# Altium PCB Power&FT232.PcbDoc
Units mil, origin at the board's own origin, x right, y up, seen from the top; angles counter-clockwise.
Board outline 1305 x 1305 mil, 2 copper layers (Top Layer, Bottom Layer); 27 components, 24 nets, 126 pads, 30 vias.
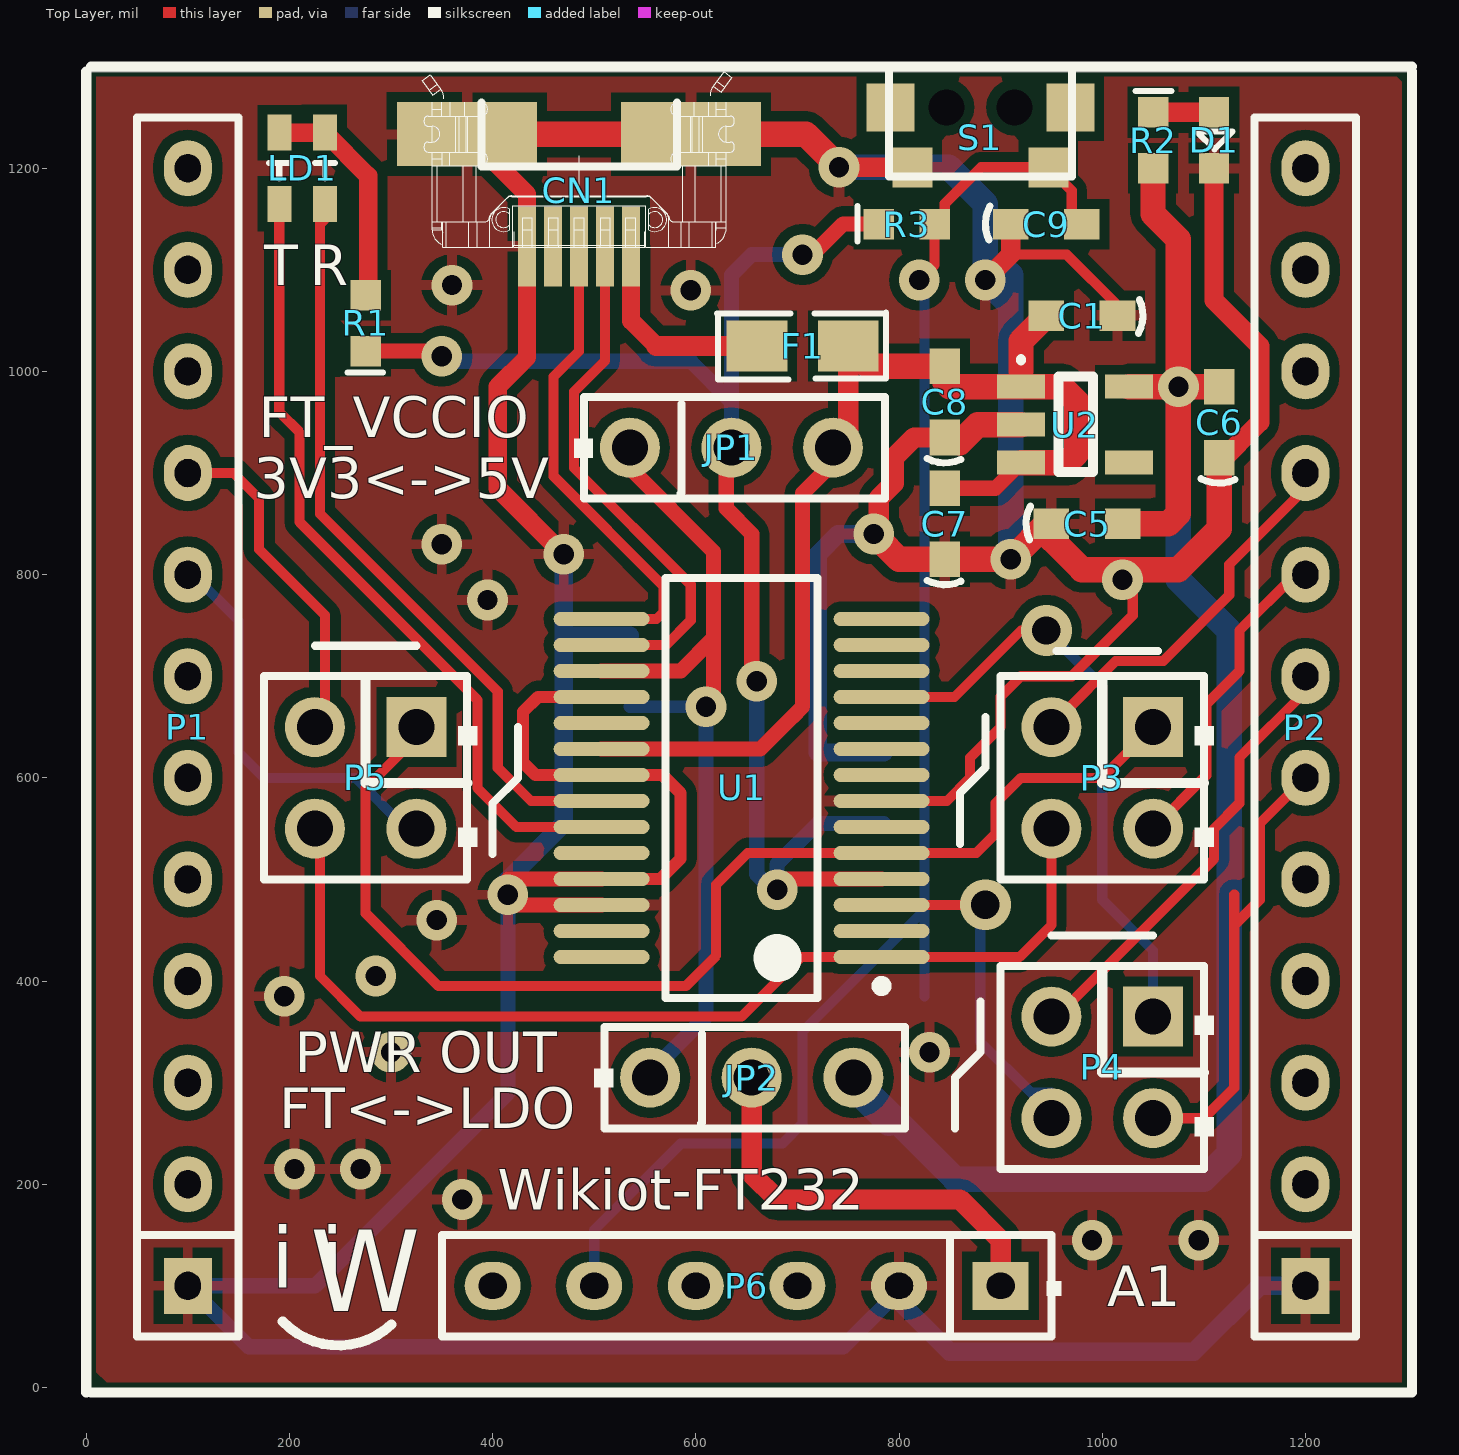
[diagram p0: Top Layer view]
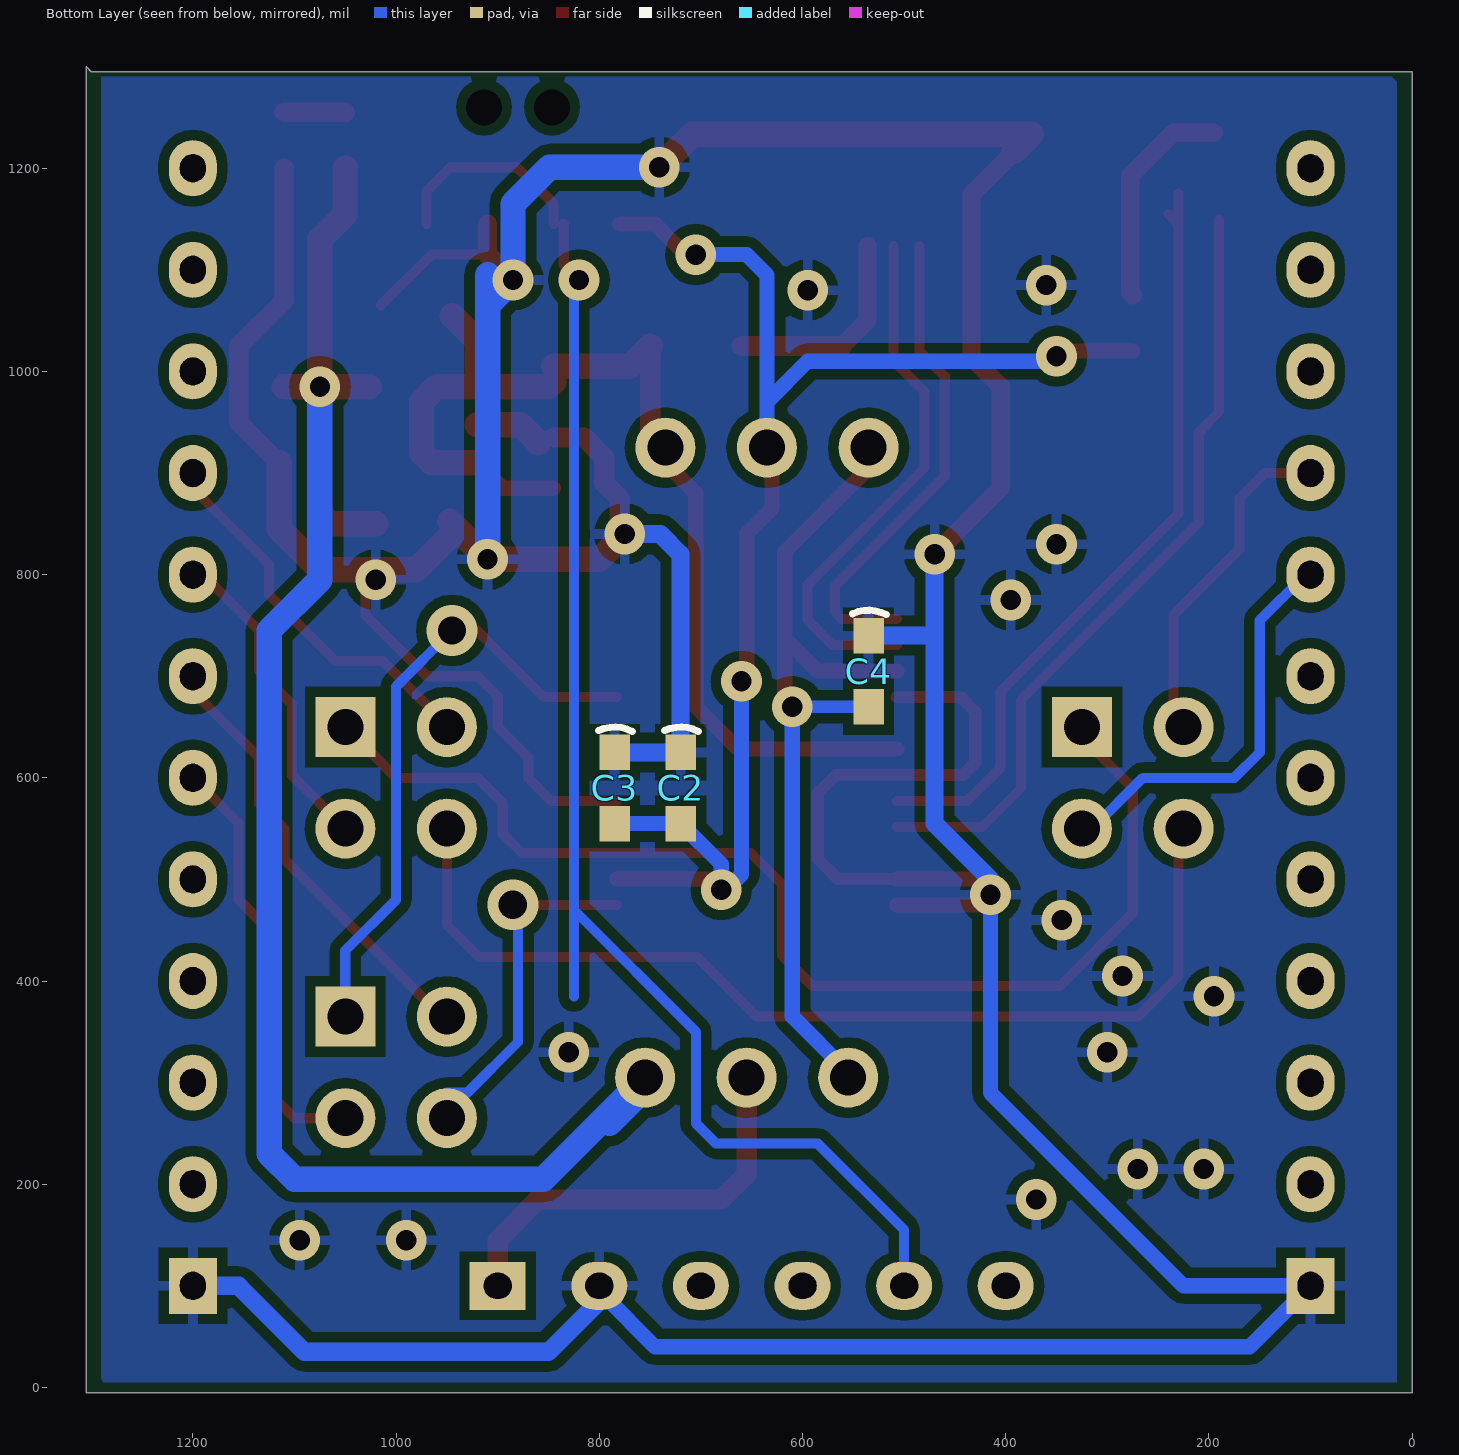
[diagram p1: Bottom Layer view, seen from below]
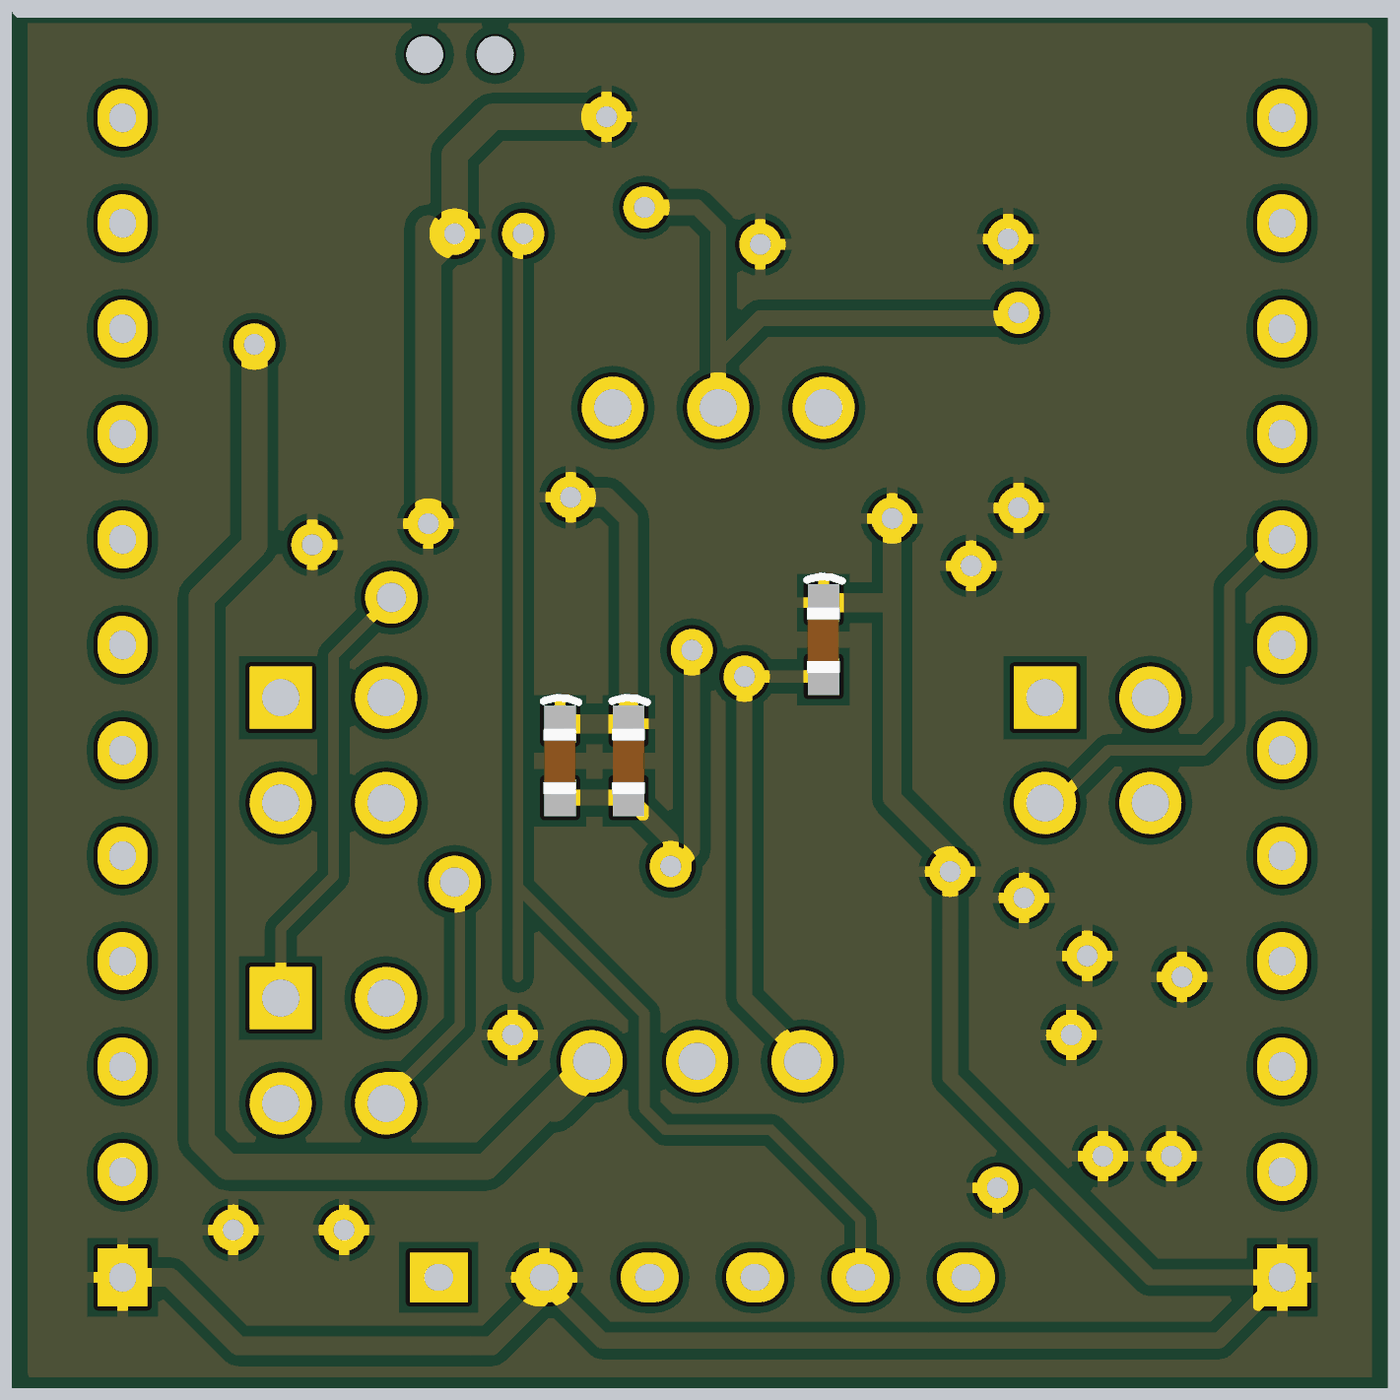
[diagram p2: 3D render of the assembled board from below, using the file's embedded part models]

## Layer stack, top to bottom
Top Solder: solder mask 0.4, Solder Resist, Dk 3.5
Top Layer: signal copper 1.4
Dielectric 1: dielectric 12.6, FR-4, Dk 4.8
Bottom Layer: signal copper 1.4
Bottom Solder: solder mask 0.4, Solder Resist, Dk 3.5

## Board outline
0,-5 0,1295 1300,1295 1305,1300 1305,-5

## Design rules (kind name [scope] priority, off if disabled: settings)
Clearance [All] p1: gap=10
PolygonConnect [All] p1: connectstyle=Relief reliefconductorwidth=10 reliefentries=4 polygonreliefangle="90 Angle" airgapwidth=10
RoomDefinition Power&FT232 [InComponentClass('Power&FT232')] p1: confinementstyle=ConfineIn formatcopy=TRUE lockcomponents=FALSE outline 0,-5 1305,-5 1305,1310 0,1310
RoutingVias [All] p1: holewidth=28 width=50 viastyle="Through Hole" minholewidth=12 minwidth=30 maxholewidth=28 maxwidth=50
SolderMaskExpansion [All] p1: expansion=4
UnpouredPolygon [All] p1: allowunpoured=FALSE
Width [All] p1: maxlimit=30 minlimit=10 preferedwidth=10 minimp=50.000000 maximp=50.000000 favimp=50.000000
29 further rules are at their usual default settings.

## Components (designator, comment, footprint, x,y, rotation, side; value= is the part's Value field where it differs from the comment)
C1 "Cap" C0603L 980,1055 r180 top
C2 "Cap" C0603L 720,590 r270 bottom
C3 "Cap" C0603L 785,590 r270 bottom
C4 "Cap" C0603L 535,705 r270 bottom
C5 "1uF" C0603L 985,850 r0 top
C6 "0.1uF" C0603L 1115,950 r90 top
C7 "0.1uF" C0603L 845,850 r90 top
C8 "1uF" C0603L 845,970 r90 top
C9 "1uF" C0603L 945,1145 r0 top
CN1 "USB-Micro" USB-MICRO-Female-Lite 485,1230 r0 top
D1 "RED" 0603pn 1110,1255 r270 top
F1 "500mA" 0805 750,1025 r180 top
JP1 "Jumper3" HDR1X3/2.54MM 535,925 r0 top
JP2 "Jumper3" HDR1X3/2.54MM 555,305 r0 top
LD1 "LTST-C195KGJRKT" 0805-LED-Bi 210,1160 r90 top
P1 "Synio Header-L 12-Pin" HDR1X12-L/2.54MM 100,100 r90 top
P2 "Synio Header-R 12-Pin" HDR1X12-L/2.54MM 1200,100 r90 top
P3 "Header 2X2" HDR2X2/2.54MM 1050,650 r180 top
P4 "Header 2X2" HDR2X2/2.54MM 1050,365 r180 top
P5 "Header 2X2" HDR2X2/2.54MM 325,650 r180 top
P6 "Synio Power Header 6 Pin" HDR1X6-L/2.54MM 900,100 r180 top
R1 "1K" 0603M 275,1020 r90 top
R2 "1K" 0603M 1050,1255 r270 top
R3 "10K" 0603M 780,1145 r0 top
S1 "RESET" KEY-2x4-SMD 880,1260 r0 top
U1 "FT232RL" SSOP-28_M 645,590 r180 top
U2 "LDO" SOT23-5 920,985 r270 top

## Footprints (in the part's own frame and the unit in brackets; to place one, negate y for a bottom-side part, rotate by r counter-clockwise, add the part's x,y. Pads: shape width x height; smd on the part's side, far side on the other; paste and mask are expansions set on the pad)
0603M [mil]
  rect 30x30 smd: 1(0,0) 2(55,0)
  silkscreen extent -21,-17 -21,18, body extent -5,-15 60,15, height 43
0603pn [mil]
  rect 30x30 smd: 1(0,0) 2(55,0)
  silkscreen extent 19,-17 36,18
0805 [mil]
  rect 60x50 smd: 1(0,0) 2(90,0)
  silkscreen extent -37,-33 129,33
0805-LED-Bi [mm]
  rect 0.9x0.6 smd: 1(0.127,-0.635) 2(0.127,0.508) 3(1.905,0.508) 4(1.905,-0.635)
  silkscreen extent 0.76,-0.89 1.14,0.76, body extent 0.32,-1.02 1.72,0.9, height 1.1
C0603L [mil]
  rect 35x30 smd: 1(-35,0) 2(35,0)
  silkscreen extent -60,-16 -56,18, body extent -31,-16 32,15, height 24
HDR1X3/2.54MM [mm]
  round 1.5 hole 0.9: 1(0,0) 2(2.54,0) 3(5.08,0)
  silkscreen extent -1.4,-1.27 6.38,1.27
HDR1X6-L/2.54MM [mm] "Connector; Header; 6 Position"
  rect 1.4x1.2 hole 0.65 slot 0.7 at 0 deg: 1(0,0)
  oval 1.4x1.2 hole 0.65 slot 0.7 at 0 deg: 2(2.54,0) 3(5.08,0) 4(7.62,0) 5(10.16,0) 6(12.7,0)
  silkscreen extent -1.52,-1.27 13.97,1.27
HDR1X12-L/2.54MM [mm] "Connector; Header; 12 Position"
  rect 1.4x1.2 hole 0.65 slot 0.7 at 0 deg: 1(0,0)
  oval 1.4x1.2 hole 0.65 slot 0.7 at 0 deg: 2(2.54,0) 3(5.08,0) 4(7.62,0) 5(10.16,0) 6(12.7,0) 7(15.24,0) 8(17.78,0) 9(20.32,0) 10(22.86,0) 11(25.4,0) 12(27.94,0)
  silkscreen extent -1.27,-1.27 29.21,1.27
HDR2X2/2.54MM [mm] "Connector; Header; 2x2 Position"
  rect 1.5x1.5 hole 0.9: 1(0,0)
  round 1.5 hole 0.9: 2(0,2.54) 3(2.54,0) 4(2.54,2.54)
  silkscreen extent -1.52,-1.27 3.81,3.81
KEY-2x4-SMD [mm] "6.8MM,2.8MM,SMD"
  rect 1.2x1.2 smd: 0(-2.25,0) 0(2.25,0)
  rect 1x1 smd: 1(-1.7,-1.5) 2(1.7,-1.5)
  round 0.8 hole 0.9 unplated: MH1(0.85,0) MH2(-0.85,0)
  silkscreen extent -2.29,-1.73 2.29,1.02, body extent -2.28,-1.6 2.29,0.94, height 1.1
SOT23-5 [mm]
  rect 0.6x1.2 smd: 1(0,0) 2(0.95,0) 3(1.9,0) 4(1.9,2.7) 5(0,2.7)
  silkscreen extent -0.69,0 2.13,1.8, body extent -0.32,0.7 2.35,2.1, height 1.1
SSOP-28_M [mm] "SOP, 28-Leads, Body 10.2x5.3mm, Pitch 0.65mm, IPC Low Density"
  oval 2.4x0.35 smd: 1(-3.5,4.225) 2(-3.5,3.575) 3(-3.5,2.925) 4(-3.5,2.275) 5(-3.5,1.625) 6(-3.5,0.975) 7(-3.5,0.325) 8(-3.5,-0.325) 9(-3.5,-0.975) 10(-3.5,-1.625) 11(-3.5,-2.275) 12(-3.5,-2.925) 13(-3.5,-3.575) 14(-3.5,-4.225) 15(3.5,-4.225) 16(3.5,-3.575) 17(3.5,-2.925) 18(3.5,-2.275) 19(3.5,-1.625) 20(3.5,-0.975) 21(3.5,-0.325) 22(3.5,0.325) 23(3.5,0.975) 24(3.5,1.625) 25(3.5,2.275) 26(3.5,2.925) 27(3.5,3.575) 28(3.5,4.225)
  silkscreen extent -3.63,-5.25 1.9,5.25, body extent -2.8,-5.25 2.8,5.25, height 2
USB-MICRO-Female-Lite [mm] "Connector; USB2.0, Type B, SM; 5 Position; Right Angle"
  rect 3.5x1.6 smd: 0(-2.802,0.088) 0(2.798,0.088)
  rect 0.45x2 smd: 1(1.298,-2.714) 2(0.648,-2.714) 3(-0.002,-2.714) 4(-0.652,-2.714) 5(-1.302,-2.714)
  silkscreen extent -3.92,-2.74 3.88,1.65

## Part data
C1 C2 C3 C4: "Capacitor"
C5 C6 C7 C8 C9: library part Cap, "Capacitor"
D1: library part LED0, "Typical INFRARED GaAs LED"
F1: library part "Fuse 1", "Fuse"
LD1: "Avago, HSMF-A203 Bi-Color LED"
P1: "Synio Header-L, 12-Pin"
P2: "Synio Header-R, 12-Pin"
P3 P4 P5: "Header, 2-Pin, Dual row"
R1 R2 R3: library part Res2, "Resistor"
S1: library part SW-PB, "Switch"
U1: "USB UART IC"
U2: library part LDO-SOT23-5, "General LDO SOT23-5"

## Via types
v1: diameter 40, hole 20, Top Layer to Bottom Layer, 28 vias
v2: diameter 50, hole 28, Top Layer to Bottom Layer, 2 vias

## Nets (pads, with @x,y where several pads share a name; then routed paths per layer and width w, separated by ;. In a path a pad name is that pad's centre, name@x,y a point inside that pad or via, vN(x,y) a via of type N, cw(c..) or ccw(c..) an arc to the next point about the centre after c; other vN are vias at no path point)
CTS1: P2.7 P4.3 | length 456.5
  Top Layer w10: P4.3 955,365 1110,520 1110,550 1135,575 1135,620 1200,685 P2.7 P2.7@1185,700
D3V3: C5.2 C6.2 JP2.3 R2.2 U2.5 | length 1740.2
  Top Layer w25: C5.2 1065,850 1075,860 1075,1130 1050,1155 R2.2 ; U2.5 v1(1075,985) C6.2@1110,985
  Bottom Layer w25: JP2.3@755,295 790,260 ; JP2.3 855,205 1100,205 1125,230 1125,745 1075,795 v1(1075,985)
D5V: C1.2 C7.2 C8.2 F1.1 JP1.3 U1.20 U2.1 U2.3 | length 1104.2
  Top Layer w15: U1.20 663.39,628.39 705,670 ; 695,660 705,670 ; JP1.3@750,925 705,880 705,670 ; C7.2 894.8,885 U2.3
  Top Layer w20: JP1.3@750,925 F1.1
  Top Layer w25: F1.1 770,1005 C8.2 ; C8.2@845,990 850,985 U2.1 960,985 975,970 975,920 965.2,910.2 U2.3 ; 920,1000 920,1030 C1.2
EX_D3V3: JP2.2 P6.1 | length 401.9
  Top Layer w20: JP2.2@655,295 655,210 680,185 860,185 900,145 P6.1
FT_3V3: C4.2 JP1.1 JP2.1 U1.17 | length 873.1
  Top Layer w15: U1.17 585.16,705.16 617.5,737.5 ; JP1.1 535,905 617.5,822.5 v1@617.5,682.5
  Bottom Layer w12: C4.2 v1(610,670)
  Bottom Layer w15: JP2.1@555,295 555,310 610,365 v1(610,670)
FT_CTS: P4.1 U1.11 | length 607.8
  Top Layer w10: U1.11 854.57,679.57 920,745 v2(945,745) v2@965,745
  Bottom Layer w10: v2(945,745) 1000,690 1000,480 1050,430 P4.1@1050,390
FT_RTS: P4.4 U1.3 | length 330.1
  Top Layer w10: U1.3 884.84,474.84 v2(885,475)
  Bottom Layer w10: v2(885,475) 880,470 880,340 930,290 P4.4@950,290
FT_RX: P3.1 P5.1 U1.5 | length 1173
  Top Layer w10: P5.1 325,640 275,590 275,466.63 346.63,395 590,395 620,425 620,495 651.02,526.02 U1.5 876.02,526.02 895,545 895,575 920,600 1000,600 P3.1
FT_TX: P3.4 P5.4 U1.1 | length 1003.8
  Top Layer w10: P5.4@230,540 230,405 270,365 645,365 703.66,423.66 U1.1 918.66,423.66 950,455 P3.4
FT_VCCIO: C2.2 C3.2 JP1.2 R1.1 R3.1 U1.4 | length 1480
  Top Layer w15: R1.1 345,1020 v1(350,1015) ; JP1.2 630,920 630,865 655,840 v1@655,695 ; v1@655,700 650,695 v1(660,695) ; v1(680,490) 690.43,500.43 U1.4 ; v1@715,1115 745,1145 R3.1
  Bottom Layer w15: v1(350,1015) 350,1010 595,1010 635,970 ; JP1.2 635,970 ; v1(660,695) 650,695 660,705 660,505 680,485 v1(680,490) 680,515 C2.2 C3.2 ; v1(705,1115) 655,1115 635,1095 635,970
GND: C1.1 C2.1 C3.1 C4.1 C5.1 C6.1 C7.1 C8.1 C9.1 CN1.0 CN1.5 D1.2 P1.1 P2.1 P6.2 S1.1 U1.7 U1.18 U1.21 U1.25 U1.26 U2.2 | length 6246.3
  Top Layer w10: U1.7 847.2,577.2 870,600 870,620 900,650 900,680 920,700 970,700 1030,760 v1@1030,805 ; 910,1115 965,1115 C1.1@1015,1065
  Top Layer w12: U1.25 565,500.43 585,520.43 585,585 567.2,602.8 U1.21 442.2,602.8 430,615 430,665 444.57,679.57 U1.18
  Top Layer w15: v1@405,490 415.43,500.43 U1.25 ; v1@410.16,474.84 U1.26
  Top Layer w18: CN1.0@391.58,1216.58 433.76,1174.4 CN1.5 433.76,1013.76 405,985 405,885 v1(470,820)
  Top Layer w19: v1(740.94,1200.94) S1.1 ; v1(885,1090) 910,1115 C9.1 ; D1.2 1110,1070 1155,1025 1155,950 C6.1@1115,910
  Top Layer w20: v1@780,835 780,875 795,890 795,915 815,935 C8.1
  Top Layer w25: CN1.0@391.58,1216.58 374.7,1233.46 595.17,1233.46 708.43,1233.46 v1(740.94,1200.94) ; v1@780,835 800,815 C7.1 v1(910,815) C5.1@947.5,852.5 ; 860,930 877.6,947.6 U2.2 ; C5.1@950,835 980,805 1030,805 1075,805 1115,845 C6.1@1115,910
  Bottom Layer w15: v1(415,485) 415,290 225,100 P1.1 160,40 745,40 P6.2@795,90 ; P6.2@800,85 P6.2
  Bottom Layer w18: v1(415,485) 415,500 470,555 v1(470,820) ; 470,740 C4.1 ; v1(775,840) 740,840 720,820 C2.1 C3.1 ; P6.2@800,85 850,35 1090,35 1155,100 P2.1
  Bottom Layer w25: v1(740.94,1200.94) 849.06,1200.94 885,1165 v1(885,1090) 910,1065 ; v1(910,815) 910,1095
  other v1: 990,145 1095,145 370,185 205,215 270,215 300,330 830,330 195,385 285,405 345,460 395,775 1020,795 350,830 595,1080 360,1085
NetCN1_1: CN1.1 F1.2 | length 207.4
  Top Layer w18: CN1.1 536.12,1050 561.12,1025
  Top Layer w20: 561.12,1025 F1.2
NetCN1_2: CN1.2 U1.16 | length 526.3
  Top Layer w10: U1.16 570.75,730.75 595,755 595,790 480,905 480,980 510.53,1010.53 CN1.2
NetCN1_3: CN1.3 U1.15 | length 478.9
  Top Layer w10: CN1.3 484.94,1019.94 460,995 460,896.72 568.17,788.55 568.17,763.17 561.34,756.34 U1.15
NetD1_1: D1.1 R2.1 | length 60
  Top Layer w19: R2.1 D1.1
NetLD1_3: LD1.3 LD1.4 R1.2 | length 218.6
  Top Layer w18: LD1.3@195,1235 LD1.4 277.5,1192.5 277.5,1077.5 R1.2
NRST: C9.2 P6.5 R3.2 S1.2 | length 1533.8
  Top Layer w10: v1(820,1090) 835,1105 R3.2 ; R3.2@845,1145 845,1165 880.94,1200.94 S1.2 970,1177.87 C9.2@970,1145
  Bottom Layer w10: P6.5 500,155 585,240 685,240 705,260 705,350 825,470 ; v1(820,1090) 825,1085 825,385
RTS1: P2.6 P4.2 | length 456.4
  Top Layer w10: P4.2 1100,265 1130,295 1130,485 ; 1130,455 1155,480 1155,555 P2.6
RX0: P1.9 P5.3 | length 349.4
  Top Layer w10: P1.9 145,900 170,875 170,825 235,760 235,640 P5.3@230,635
RX1: P2.9 P3.3 | length 372.6
  Top Layer w10: P3.3@960,650 960,661.72 1013.28,715 1060,715 1125,780 1125,810 1190,875 P2.9@1190,900
RX_LED: LD1.1 U1.22 | length 767.4
  Top Layer w10: 230,1145 LD1.1@240,1155 ; LD1.1@230,1175 230,860 405,685 405,610 437.8,577.2 U1.22
TX0: P1.8 P5.2 | length 404.7
  Bottom Layer w10: P1.8 105,800 150,755 150,625 175,600 265,600 315,550 P5.2
TX1: P2.8 P3.2 | length 318
  Top Layer w10: P3.2 1102.5,602.5 1102.5,672.5 1135,705 1135,745 1190,800 P2.8
TX_LED: LD1.2 U1.23 | length 778.9
  Top Layer w10: LD1.2@190,1150 190,960 210,940 210,851.72 385,676.72 385,590 423.39,551.61 U1.23
pads on no net: CN1.4 P1.2 P1.3 P1.4 P1.5 P1.6 P1.7 P1.10 P1.11 P1.12 P2.2 P2.3 P2.4 P2.5 P2.10 P2.11 P2.12 P6.3 P6.4 P6.6 S1.0 S1.MH1 S1.MH2 U1.2 U1.6 U1.8 U1.9 U1.10 U1.12 U1.13 U1.14 U1.19 U1.24 U1.27 U1.28 U2.4

## Polygon pours and split planes (outlines as drawn)
GND on Top Layer "Top Layer-No Net" (solid, remove dead copper, pour order 2): 10,1290 1290,1290 1295,1285 1295,5 20,5 10,15
GND on Bottom Layer "Top Layer-No Net" (solid, remove dead copper, pour order 4): 15,5 1295,5 1290,10 1290,1290 20,1290 15,1285

## Silkscreen, mask and mechanical layers (free items; w line width, h text height)
Top Overlay:
  lines w8: 225,730 325,730 ; 400,525 400,575 425,600 425,650 ; 855,255 855,305 880,330 880,380 ; 860,535 860,585 885,610 885,660 ; 950,445 1050,445 ; 955,725 1055,725
  lines w10: 0,-5 0,1295 ; 5,-5 1305,-5 1305,1295 ; 5,1300 1305,1300 ; 193.34,65 ccw(c248.34,117) 300.34,62
  text "T" at 175,1085 h40
  text "R" at 220,1085 h40
  text "FT_VCCIO" at 170,935 h40
  text "3V3<->5V" at 165,875 h40
  text "PWR OUT" at 205,310 h40
  text "FT<->LDO" at 190,255 h40
  text "Wikiot-FT232" at 405,175 h40
  text "i i" at 182.34,98 h60
  text "A1" at 1005,80 h40
  text "W" at 220.34,75 h80